# EAGLE board node2-frontend (EAGLE 4.11)
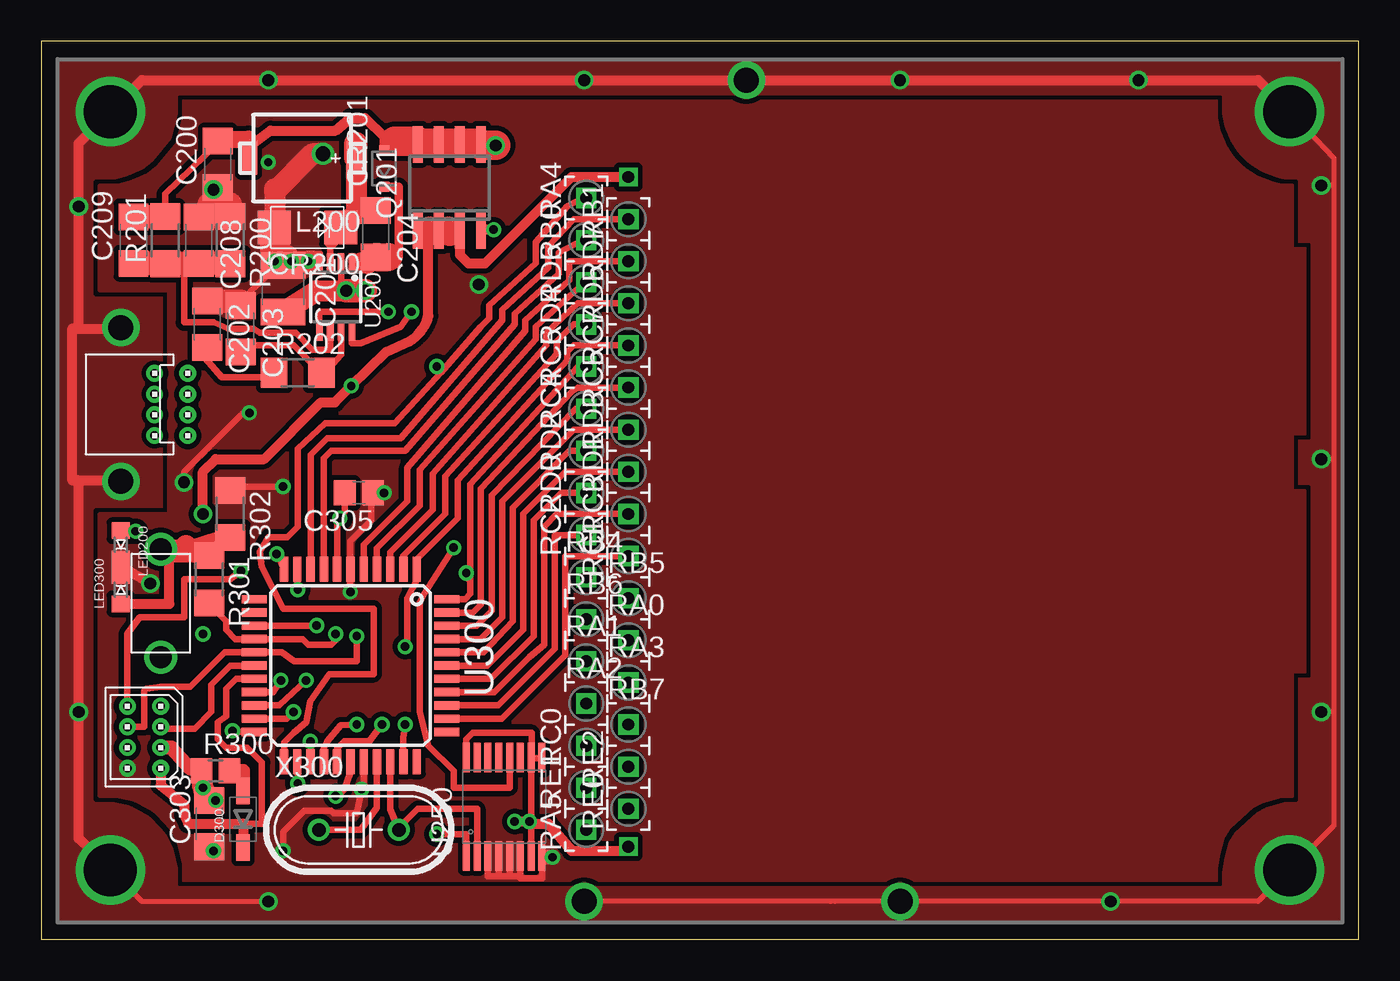
[diagram p0: board, top side]
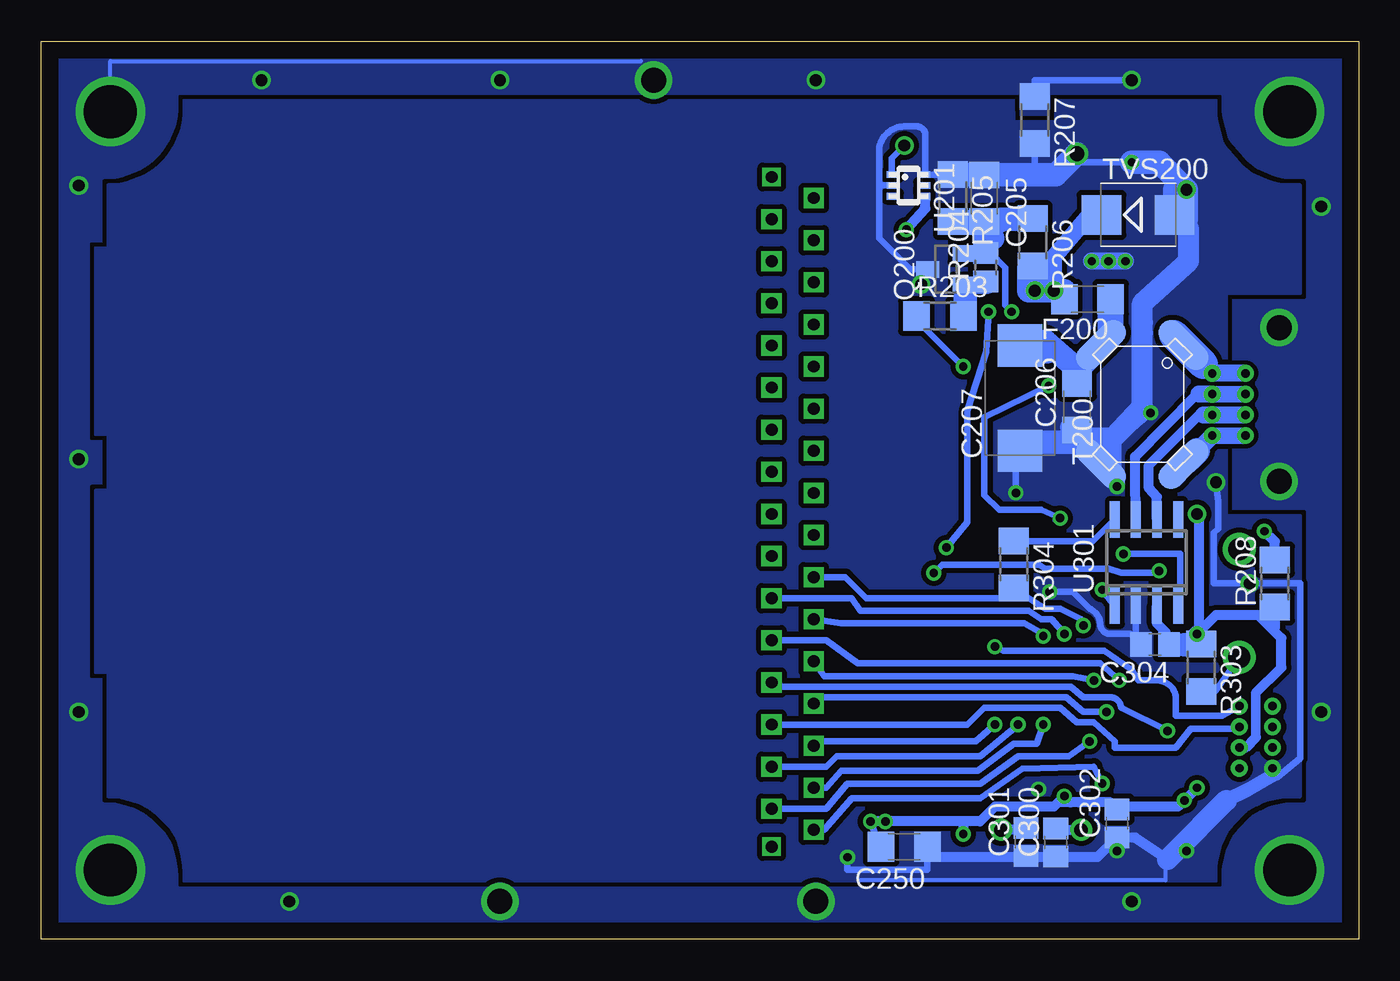
[diagram p1: board, bottom side, seen from below]

Size 79.43 x 54.14 mm. Coordinates in mm from the lower left corner, seen from the top.
Outline: 0,0 79.43,0 79.43,54.14 0,54.14 0,0
Copper layers (1*16): Top 0.035mm / dielectric 1.5mm / Bottom 0.035mm
Design rules "LV2": minimum track width 8mil, minimum drill 20mil, track to track 8mil, track to pad 8mil, pad to pad 8mil, via to via 8mil, smd to smd 0mil, copper to edge 40mil, drill to drill 8mil, minimum pad ring 10mil, minimum via ring 8mil, stop-mask expansion 4mil, vias tented up to drill 0mil, thermal gap 10mil
tKeepout: area 72.1,46.7 to 78.4,53.1; area 72.1,1 to 78.4,7.4; area 1,46.7 to 7.3,53.1; area 1,1 to 7.3,7.4

## Footprints (pad centres in the part's own frame; a part is rotated, then mirrored left to right if it is on the bottom)
C1206 = smd 1.6 x 1.8: 1 -1.4,0; 2 1.4,0
C1210 = smd 1.6 x 2.7: 1 -1.4,0; 2 1.4,0
D/7343-31R = smd 2.55 x 2.7: + 3.175,0; - -3.175,0
C0805 = smd 1.3 x 1.5: 1 -0.85,0; 2 0.85,0
JST-08R-JED = drill 0.508 pad 1.016 round: 1 1.875,1; 2 1.875,-1; 3 0.625,1; 4 0.625,-1; 5 -0.625,1; 6 -0.625,-1; 7 -1.875,1; 8 -1.875,-1
CAN_NODE = drill 0.508 pad 1.016 round: B+@1 2,1.875; B+@2 0,1.875; B-@7 2,-1.875; B-@8 0,-1.875; CANH@3 2,0.625; CANH@4 0,0.625; CANL@5 2,-0.625; CANL@6 0,-0.625 | drill 1.511 round: CHASSIS@1 -2.032,4.636; CHASSIS@2 -2.032,-4.636
NMINIP2-J1 = smd 2 x 2: A 2,0; C -2,0
SOD323-R = smd 0.6 x 0.6: A 1.1,0; C -1.1,0
SOD-123-DIODE = smd 1.6 x 0.8: 1(CATHODE) -1.7,0; 2(ANODE) 1.7,0
1206 = smd 1.6 x 1.8: 1 -1.4,0; 2 1.4,0
MP2A = smd 1.05 x 2: P1 -3.225,0; P2 3.225,0
0603-DIODE = smd 1 x 1.1: A -0.85,0; K 0.85,0
SOT23 = smd 1 x 1.4: 1 -0.95,-1.1; 2 0.95,-1.1; 3 0,1.1
SO8 = smd 0.6 x 2.2: 1 -1.905,-2.6; 2 -0.635,-2.6; 3 0.635,-2.6; 4 1.905,-2.6; 5 1.905,2.6; 6 0.635,2.6; 7 -0.635,2.6; 8 -1.905,2.6
R1206 = smd 1.6 x 1.803: 1 -1.422,0; 2 1.422,0
R0805 = smd 1.3 x 1.5: 1 -0.85,0; 2 0.85,0
PAD_SQUARE_APC-FREE_0.1/028 = drill 0.711 pad 1.168 square: PAD 0,0
SW_6X3.5MM = drill 1.321 round: 1 -3.25,0; 2 3.25,0
CMS1 = smd 3.63 x 1.5 rotated 45: 1 3.58,-2.5; 3 -3.58,2.5 | smd 3.63 x 1.5 rotated 135: 2 3.58,2.5; 4 -3.58,-2.5
SMB = smd 2.4 x 2.4: A 2.2,0; C -2.2,0
MSOP8 = smd 0.4 x 1.2: 1 -0.975,-2.05; 2 -0.325,-2.05; 3 0.325,-2.05; 4 0.975,-2.05; 5 0.975,2.05; 6 0.325,2.05; 7 -0.325,2.05; 8 -0.975,2.05
SC70-6 = smd 0.4 x 0.75: 1 -0.65,-0.95; 2 0,-0.95; 3 0.65,-0.95; 4 0.65,0.95; 5 0,0.95; 6 -0.65,0.95
TSSOP-16 = smd 0.42 x 1.78: 1 -2.275,-2.97; 2 -1.625,-2.97; 3 -0.975,-2.97; 4 -0.325,-2.97; 5 0.325,-2.97; 6 0.975,-2.97; 7 1.625,-2.97; 8 2.275,-2.97; 9 2.275,2.97; 10 1.625,2.97; 11 0.975,2.97; 12 0.325,2.97; 13 -0.325,2.97; 14 -0.975,2.97; 15 -1.625,2.97; 16 -2.275,2.97
TQFP44 = smd 1.5 x 0.5: 1 -5.8,4; 2 -5.8,3.2; 3 -5.8,2.4; 4 -5.8,1.6; 5 -5.8,0.8; 6 -5.8,0; 7 -5.8,-0.8; 8 -5.8,-1.6; 9 -5.8,-2.4; 10 -5.8,-3.2; 11 -5.8,-4; 23 5.8,-4; 24 5.8,-3.2; 25 5.8,-2.4; 26 5.8,-1.6; 27 5.8,-0.8; 28 5.8,0; 29 5.8,0.8; 30 5.8,1.6; 31 5.8,2.4; 32 5.8,3.2; 33 5.8,4 | smd 0.5 x 1.5: 12 -4,-5.8; 13 -3.2,-5.8; 14 -2.4,-5.8; 15 -1.6,-5.8; 16 -0.8,-5.8; 17 0,-5.8; 18 0.8,-5.8; 19 1.6,-5.8; 20 2.4,-5.8; 21 3.2,-5.8; 22 4,-5.8; 34 4,5.8; 35 3.2,5.8; 36 2.4,5.8; 37 1.6,5.8; 38 0.8,5.8; 39 0,5.8; 40 -0.8,5.8; 41 -1.6,5.8; 42 -2.4,5.8; 43 -3.2,5.8; 44 -4,5.8
HC49U70 = drill 0.813 round: 1 -2.413,0; 2 2.413,0

## Placement (x,y rotation side)
C200  22  [C1206]  10.63,46.73 90 top
C201  10  [C1210]  14.57,39.24 270 top
C202  470pF  [C1206]  9.99,37.08 270 top
C203  np  [C1206]  12.03,36.83 270 top
C204  0.1  [C1206]  20.16,42.54 270 top
C205  .1  [C1206]  22.57,44.7 270 bottom
C206  .33  [C1206]  16.98,32.13 90 bottom
C207  22  [D/7343-31R]  20.41,32.63 90 bottom
C208  10pF  [C1206]  9.49,42.16 270 top
C209  120pF  [C1206]  5.55,42.16 90 top
C250  .1  [C1206]  27.39,5.58 180 bottom
C300  27pF  [C0805]  18.25,5.84 90 bottom
C301  27pF  [C0805]  20.05,5.86 90 bottom
C302  .1  [C0805]  14.57,6.98 90 bottom
C303  .1  [C1206]  10.12,6.98 90 top
C304  .1  [C0805]  12.28,17.77 180 bottom
C305  .1  [C0805]  19.14,26.92 180 top
CF300  ICD  [JST-08R-JED]  6.18,12.19 270 top
CM200  CAN  [CAN_NODE]  6.82,32.25 0 top
CR200  MA2Q705  [NMINIP2-J1]  16.04,42.92 180 top
CR201  1N4448HWS  [SOD323-R]  20.66,46.48 90 top
D300  1N4148  [SOD-123-DIODE]  12.15,7.23 90 top
F200  1A  [1206]  16.35,38.6 180 bottom
L200  47uH  [MP2A]  15.71,47.11 180 top
LED200  LED-GRN-  [0603-DIODE]  4.79,23.79 270 top
LED300  LED-RED-0603  [0603-DIODE]  4.79,21.08 90 top
Q200  '3906  [SOT23]  24.88,40.4 90 bottom
Q201  TPC8009  [SO8]  24.6,45.33 0 top
R200  10k  [R1206]  11.39,42.16 270 top
R201  29.4k  [R1206]  7.46,42.16 90 top
R202  10k  [R1206]  15.46,34.16 0 top
R203  10k  [R1206]  25.24,37.59 0 bottom
R204  100k  [R0805]  22.49,40.52 90 bottom
R205  10.0k  [R1206]  24.47,44.7 270 bottom
R206  60.4k  [R1206]  19.65,42.03 270 bottom
R207  100k  [R1206]  19.52,49.4 270 bottom
R208  1.8k  [R1206]  5.04,21.46 90 bottom
R300  1k  [R0805]  10.5,10.15 0 top
R301  750  [R1206]  10.12,21.71 270 top
R302  47.5k  [R1206]  11.39,25.65 270 top
R303  1.8k  [R1206]  9.49,16.38 270 bottom
R304  ???  [R1206]  20.79,22.6 270 bottom
RA0  t19  [PAD_SQUARE_APC-FREE_0.1/028]  35.4,18.03 0 top
RA1  t20  [PAD_SQUARE_APC-FREE_0.1/028]  32.85,16.76 0 top
RA2  t21  [PAD_SQUARE_APC-FREE_0.1/028]  32.85,14.22 0 top
RA3  t22  [PAD_SQUARE_APC-FREE_0.1/028]  35.4,15.49 0 top
RA4  T23  [PAD_SQUARE_APC-FREE_0.1/028]  32.85,44.7 90 top
RA5  t24  [PAD_SQUARE_APC-FREE_0.1/028]  32.85,6.6 90 top
RB0  t8  [PAD_SQUARE_APC-FREE_0.1/028]  32.85,42.16 90 top
RB1  t9  [PAD_SQUARE_APC-FREE_0.1/028]  35.4,43.43 90 top
RB4  t14  [PAD_SQUARE_APC-FREE_0.1/028]  32.85,21.84 0 top
RB5  t15  [PAD_SQUARE_APC-FREE_0.1/028]  35.4,20.57 0 top
RB6  t16  [PAD_SQUARE_APC-FREE_0.1/028]  32.85,19.3 0 top
RB7  t17  [PAD_SQUARE_APC-FREE_0.1/028]  35.4,12.95 0 top
RC0  t32  [PAD_SQUARE_APC-FREE_0.1/028]  32.85,11.68 90 top
RC1  t35  [PAD_SQUARE_APC-FREE_0.1/028]  35.4,23.11 90 top
RC2  t36  [PAD_SQUARE_APC-FREE_0.1/028]  32.85,24.38 90 top
RC3  t37  [PAD_SQUARE_APC-FREE_0.1/028]  35.4,25.65 90 top
RC4  t42  [PAD_SQUARE_APC-FREE_0.1/028]  32.85,32 90 top
RC5  t43  [PAD_SQUARE_APC-FREE_0.1/028]  35.4,33.27 90 top
RC6  t44  [PAD_SQUARE_APC-FREE_0.1/028]  32.85,34.54 90 top
RC7  t1  [PAD_SQUARE_APC-FREE_0.1/028]  35.4,35.81 90 top
RD0  t38  [PAD_SQUARE_APC-FREE_0.1/028]  32.85,26.92 90 top
RD1  t39  [PAD_SQUARE_APC-FREE_0.1/028]  35.4,28.19 90 top
RD2  t40  [PAD_SQUARE_APC-FREE_0.1/028]  32.85,29.46 90 top
RD3  t41  [PAD_SQUARE_APC-FREE_0.1/028]  35.4,30.73 90 top
RD4  t2  [PAD_SQUARE_APC-FREE_0.1/028]  32.85,37.08 90 top
RD5  t3  [PAD_SQUARE_APC-FREE_0.1/028]  35.4,38.35 90 top
RD6  t4  [PAD_SQUARE_APC-FREE_0.1/028]  32.85,39.62 90 top
RD7  t5  [PAD_SQUARE_APC-FREE_0.1/028]  35.4,40.89 90 top
RE0  t25  [PAD_SQUARE_APC-FREE_0.1/028]  35.4,7.87 90 top
RE1  t26  [PAD_SQUARE_APC-FREE_0.1/028]  32.85,9.14 90 top
RE2  t27  [PAD_SQUARE_APC-FREE_0.1/028]  35.4,10.41 90 top
SW300  SW_MOMENTARY-6X3.5MM  [SW_6X3.5MM]  7.2,20.26 90 top
T200  CMS1  [CMS1]  13.04,32.25 90 bottom
TVS200  SMBJ18A  [SMB]  13.3,43.68 0 bottom
U200  LT1767EMS8  [MSOP8]  17.74,38.73 180 top
U201  MAX4841  [SC70-6]  27.14,45.46 270 bottom
U250  HC161  [TSSOP-16]  27.9,8 0 top
U300  PIC18F458  [TQFP44]  18.63,16.5 270 top
U301  CANBUS  [SO8]  12.79,22.73 0 bottom
X300  10MHz  [HC49U70]  19.14,6.6 0 top

## Library data of the parts
C200-C206 C208 C209 C250 = discrete-smd-ipc
C207 C300-C305 R200-R208 R300-R304 = rcl
CF300 CM200 D300 L200 LED200 LED300 Q201 RA0 RA1-RA5 RB0 RB1 RB4-RB7 RC0 RC1-RC7 RD0 RD1-RD7 RE0 RE1 RE2 SW300 T200 U201 U250 U300 U301 = psas_eagle_library
CR200 F200 = custom
CR201 TVS200 = diode
Q200 = semicon-smd-ipc
U200 = custom-linear-technology
X300 = crystal

## Nets
B+: CM200.B+@1 CM200.B+@2 T200.1
B-: CM200.B-@7 CM200.B-@8 T200.4
BIN: C206.2 C207.+ F200.1 T200.2
BOOST: C204.2 CR201.C U200.1
CAN_RS: R304.1 U301.8
CANH: CM200.CANH@3 CM200.CANH@4 U301.7
CANL: CM200.CANL@5 CM200.CANL@6 U301.6
CHASSIS: CM200.CHASSIS@1 CM200.CHASSIS@2 R207.1
FB: C208.2 C209.1 R200.2 R201.1 U200.6
GND: C200.1 C201.1 C202.1 C203.1 C205.1 C206.1 C207.- C208.1 C250.1 C300.1 C301.1 C302.1 C303.1 C304.2 C305.1 CF300.2 CR200.A LED200.K LED300.K Q200.3 R200.1 R205.1 R207.2 R302.1 T200.3 TVS200.A U200.4 U201.2 U201.6 U250.3 U250.4 U250.5 U250.6 U250.8 U300.6 U300.29 U301.2
LED200_A: LED200.A R208.2
PIC_CANRX: U300.11 U301.4
PIC_CANTX: U300.10 U301.1
PIC_CLKIN: C300.2 U300.30 X300.1
PIC_CLKOUT/10MHZ: C301.2 U250.2 U300.31 X300.2
PIC_LAMP: LED300.A R301.1 R302.2 SW300.2
PIC_MCLR/VPP: CF300.1 D300.1(CATHODE) U300.18
PIC_PWR: C250.2 C302.2 C303.2 C304.1 C305.2 CF300.3 R208.1 R300.1 R303.1 U250.1 U250.7 U250.9 U250.10 U250.16 U300.7 U300.28 U301.3
PIC_RA0/AN0: RA0.PAD U300.19
PIC_RA1/AN1: RA1.PAD U300.20
PIC_RA2/AN2: RA2.PAD U300.21
PIC_RA3/AN3: RA3.PAD U300.22
PIC_RA4/SPS_OFF\: R203.1 RA4.PAD U300.23
PIC_RA5/AN4: RA5.PAD U300.24
PIC_RB0/INT0: RB0.PAD U300.8
PIC_RB1/INT1: RB1.PAD U300.9
PIC_RB4/CAN_RS: R304.2 RB4.PAD U300.14
PIC_RB5: R301.2 RB5.PAD U300.15
PIC_RB6: CF300.6 RB6.PAD U300.16
PIC_RB7: CF300.5 RB7.PAD U300.17
PIC_RC0/T1CKI: RC0.PAD U300.32
PIC_RC1/T1OSI: RC1.PAD U300.35
PIC_RC2/CCP1: RC2.PAD U300.36
PIC_RC3/SCL: RC3.PAD U300.37
PIC_RC4/SDI: RC4.PAD U300.42
PIC_RC5/SDO: RC5.PAD U300.43
PIC_RC6/TX: CF300.8 RC6.PAD U300.44
PIC_RC7/RX: CF300.7 RC7.PAD U300.1
PIC_RD0: RD0.PAD U300.38
PIC_RD1: RD1.PAD U300.39
PIC_RD2: RD2.PAD U300.40
PIC_RD3: RD3.PAD U300.41
PIC_RD4: RD4.PAD U300.2
PIC_RD5: RD5.PAD U300.3
PIC_RD6: RD6.PAD U300.4
PIC_RD7: RD7.PAD U300.5
PIC_RE0/AN5: RE0.PAD U300.25
PIC_RE1/AN6: RE1.PAD U300.26
PIC_RE2/AN7: RE2.PAD U300.27
Q201_B: Q200.1 R203.2 R204.1
Q201_GATE: Q201.4 U201.4
SHDN\: C205.2 Q200.2 R204.2 R205.2 R206.1 U200.5
SPS: Q201.1 Q201.2 Q201.3
SPS_BUCK_OUT: C200.2 C209.2 CR201.A L200.P2 Q201.5 Q201.6 Q201.7 Q201.8 R201.2 U201.1
SPS_SYNC: U200.8 U250.12
SW_PWR: R303.2 SW300.1
SYNC_QD: U250.11
VC: C203.2 R202.2 U200.7
VC_FLT: C202.2 R202.1
VIN: C201.2 F200.2 R206.2 TVS200.C U200.2
VPP_PULLUP: D300.2(ANODE) R300.2
VSW: C204.1 CR200.C L200.P1 U200.3

## Tracks (layer width: path | path; a pad name or v marks a point on that pad's centre or on a via)
B+
  Bottom 1.016: CM200.B+@2 CM200.B+@1 | CM200.B+@1 8.85,34.13 8.85,34.16 | CM200.B+@1 8.85,34.16 | 8.85,34.16 9.36,34.67
  Bottom 1.778: 9.36,34.67 10.63,35.94 | 10.63,35.94 T200.1 | 10.63,35.94 11.14,36.44
B-
  Bottom 0.406: T200.4 10.58,28.67 11.24,27.96
  Bottom 1.016: CM200.B-@8 8.85,30.35 CM200.B-@7 9.74,29.46
  Bottom 1.524: 9.74,29.46 arc0 11.24,27.96
BIN
  Bottom 0.406: T200.2 15.4,35.73 15.46,35.68 15.4,35.68
  Bottom 1.422: C206.2 16.98,34.29 | 15.43,35.96 15.46,35.94 | 15.43,35.96 T200.2 15.35,35.96 15.33,35.94 16.98,34.29 | 15.43,35.96 14.95,36.45 | 16.98,34.29 16.98,34.41 18.89,36.06 18.76,35.43 20.41,35.43 C207.+
  Bottom 1.575: 14.95,36.45 F200.1
BOOST
  Top 0.254: 19.65,40.78 20.28,40.78 C204.2
  Top 0.406: U200.1 19.65,40.78 19.65,40.76
  Top 0.508: CR201.C 21.55,45.38 21.55,41.14 20.92,41.14
  Top 1.27: 19.65,40.76 19.14,40.76
  Top 1.676: C204.2 20.28,41.14 20.92,41.14
CAN_RS
  Bottom 0.406: R304.1 20.79,24 16.02,24 U301.8
CANH
  Bottom 0.61: U301.7 13.42,26.28 13.47,27.07 13.47,29.1 9.75,32.88 9.61,32.89
  Bottom 1.016: 8.85,32.89 CM200.CANH@4 | 8.85,32.89 CM200.CANH@3 | 9.61,32.89 8.85,32.89
CANL
  Bottom 0.61: U301.6 12.15,26.66 12.64,27.2 12.64,28.59 9.6,31.63 9.36,31.62
  Bottom 1.016: 8.85,31.62 CM200.CANL@6 | 8.85,31.62 CM200.CANL@5 | 9.36,31.62 8.85,31.62
CHASSIS  (via drill 0.71, 1.51, 3.17)
  Top 0.254: 4.79,36.95 CM200.CHASSIS@1 4.79,36.83 | 4.79,27.68 CM200.CHASSIS@2
  Top 0.305: 77.94,45.46 77.94,47.11 v75.27,49.91 | 77.94,45.46 77.94,28.95 | 77.94,28.95 77.94,13.71 | 77.94,13.71 77.94,6.85 v75.27,4.19 73.37,2.28 v64.48,2.28 v51.78,2.28 | v51.78,2.28 51.65,2.28 | v51.78,2.28 47.84,2.28 | 47.84,2.28 47.59,2.28 | 47.84,2.28 v32.73,2.28 | v4.15,4.19 6.06,2.28 v13.68,2.28 | 77.94,13.71 v77.18,13.71 | 77.94,28.95 v77.18,28.95 | 77.94,45.46 v77.18,45.46
  Top 0.61: v4.15,4.19 2.25,6.09 v2.25,13.71 2.25,27.68 | 2.25,27.68 4.79,27.68 | 2.25,27.68 1.87,27.68 1.87,36.83 2.25,36.83 | 2.25,36.83 4.79,36.83 | 2.25,36.83 v2.25,44.19 2.25,48 v4.15,49.91 6.06,51.81 v13.68,51.81 v32.73,51.81 v42.51,51.81 v51.78,51.81 v66.15,51.81 73.37,51.81 v75.27,49.91
  Bottom 0.254: 43.27,52.95 75.27,52.95 v75.27,49.91
  Bottom 0.406: 19.52,50.8 R207.1 19.52,51.81 v13.68,51.81
  pour Bottom (isolate 0.254, rank 2, no thermals): 0.98,1.01 78.45,1.01 78.45,53.08 0.98,53.08
  pour Top (isolate 0.254, rank 2, no thermals): 0.98,1.01 0.98,53.08 78.45,53.08 78.45,1.01
FB
  Top 0.406: C209.1 | 11.9,40.76 11.8,40.76 R200.2 | U200.6 17.42,35.55 16.35,35.55 15.33,36.57 13.17,36.57 12.79,36.83 11.27,36.83 10.38,37.21 8.6,37.21 8.6,40.51 8.98,40.64 8.98,40.76
  Top 1.422: R200.2 11.37,40.76 C208.2 8.98,40.76 7.46,40.76 R201.1 7.43,40.76 C209.1
GND  (via drill 0.51, 0.71, 0.89)
  Top 0.254: 14.69,41.02 14.82,40.89 | U200.4 16.85,40.87 16.85,41.4 16.6,41.4 16.35,41.14 16.35,40.89
  Top 0.406: 14.09,45.24 CR200.A | v20.66,26.92 C305.1 19.9,26.92 19.9,25.27 18.63,24 U300.6 v18.63,20.95 | v19.3,9.05 19.01,7.62 17.62,7.62 17.49,7.74 15.84,7.74 14.57,6.47 v14.57,5.33 | C203.1 12.03,38.48 14.06,40.51 v14.06,40.89 | C200.1 10.63,45.46 v10.38,45.21 | v8.6,27.55 8.6,28.19 12.15,31.75 v12.54,31.75 12.66,31.75 | R302.1 11.62,27.3 v14.57,27.3 | v19.3,9.05 19.27,8.76 | U300.29 19.43,8.92 v19.3,9.05 | C303.1 v10.37,5.33 v10.38,5.33 | 28.23,3.8 U250.5 | 27.58,3.8 U250.4 | U250.3 26.93,3.8 27.58,3.8 | 28.23,3.8 27.58,3.8 | 28.23,3.8 28.88,3.8 U250.6 28.88,3.68 30.19,3.68 U250.8 30.75,5.03 v30.82,4.95 | 30.44,4.95 30.36,5.03
  Top 0.61: 14.09,41.02 14.06,41.02 | 14.06,41.02 v14.06,40.89 | 14.06,41.02 13.93,40.89 | LED300.K 4.83,22.43 v6.57,21.46
  Top 0.914: v30.82,4.95 30.44,4.95
  Top 1.016: LED300.K LED200.K
  Top 1.27: C201.1 14.82,40.89 v15.07,40.89 v16.09,40.89 16.35,40.89 | 14.09,45.24 14.06,45.24 14.06,45.08 | 14.06,45.08 14.06,43.68 | 14.06,45.08 16.35,47.37 v16.98,47.37
  Top 1.422: 10.63,43.56 C208.1 | 10.63,43.56 11.39,43.56 | 10.63,43.56 | 10.63,44.32 10.63,43.56 | C200.1 10.63,44.32 | C202.1 12.03,38.48 | 10.63,44.32 10.12,44.32 | R200.1 11.39,44.32 10.63,44.32
  Top 1.778: CR200.A 14.09,41.02 14.69,41.02
  Bottom 0.254: 30.09,3.55 11.65,3.55 11.65,4.82 11.52,4.82
  Bottom 0.406: 17.11,30.22 17.11,30.09 | 24.47,46.1 26.19,46.1 U201.6 26.12,46.11 26.12,48.51 arc-90 26.63,49.02 27.39,49.02 arc-90 28.92,47.49 28.92,45.46 | 28.92,45.46 28.92,42.29 27.03,40.4 Q200.3 26.38,40 v26.38,39.49 26.38,39.37 | 28.03,45.46 U201.2 28.92,45.46 | C207.- 20.47,29.39 20.66,29.2 v20.66,26.92 | v18.63,20.95 17.23,20.95 16.22,19.93 arc64 15.58,19.04 arc-90 14.95,18.41 13.77,18.41 C304.2 13.04,17.77 13.42,18.16 U301.2 | v19.3,9.05 19.14,9.01 | 14.57,6.34 C302.1 v14.57,5.33 | v13.68,46.86 16.73,46.86 17.11,47.24 | v8.6,27.55 8.47,26.41 8.47,24.76 8.72,24.51 8.72,21.46 v6.57,21.46 3.52,21.46 3.52,10.92 4.92,9.77 5.18,10.03 CF300.2 | 14.82,30.35 14.76,30.28 14.44,29.97 arc4 v12.54,31.75 12.79,31.75 | 11.2,5.14 11.14,5.08 10.63,5.08 v10.38,5.33 | C250.1 25.99,4.19 30.82,4.19 v30.82,4.95 | 19.52,48 R207.2 19.52,46.1 18.25,46.1
  Bottom 0.61: 17.11,29.97 17.11,30.22 17.11,30.6 C206.1 16.48,30.22 15.07,30.22 | 11.52,4.82 13.46,6.13 C302.1 15.75,4.95 18.25,4.95 C300.1 18.29,4.95 19.99,4.95 C301.1 20.12,4.95 25.36,4.95 C250.1
  Bottom 0.813: 7.96,8.38 6.69,9.01 5.17,9.9 5.17,10.3 CF300.2
  Bottom 0.965: v14.57,27.3 14.57,27.93 14.95,28.32
  Bottom 1.016: v14.06,40.89 v16.09,40.89 | 14.82,30.22 14.82,28.32 14.95,28.32 15.46,28.32
  Bottom 1.27: 16.98,30.47 16.85,30.35 | C206.1 16.98,30.47 | 16.98,30.47 17.36,30.86 | 7.96,8.38 11.2,5.14 11.52,4.82 | 13.04,36.57 13.04,32.13 14.76,30.28 14.82,30.22 15.07,30.22 16.5,30.22 | 13.04,36.57 13.04,38.35 10.25,40.89 10.25,42.84 TVS200.A | 13.04,36.57 13.04,37.21
  Bottom 1.422: T200.3 16.98,30.12 C206.1 | C205.1 22.7,46.1 | R205.1 24.47,46.1 22.7,46.1 | v16.98,47.37 17.11,47.24 18.25,46.1 22.7,46.1 | v13.68,46.86 12.03,46.86 v10.38,45.21 | v10.38,45.21 10.38,43.43 | TVS200.A 11.1,45.21 v10.38,45.21 | 20.47,29.39 20.41,29.33 19.77,29.97 17.11,29.97
  pour Bottom (isolate 0.305, no thermals): 3.52,25.52 7.96,25.52 7.96,29.59 4.79,29.59 4.79,34.92 7.96,34.92 7.96,38.98 3.52,38.98 3.52,45.46 4.66,45.46 5.17,45.59 5.55,45.72 6.44,46.1 7.07,46.6 7.84,47.49 8.22,48 8.6,49.53 8.6,50.54 18.25,50.54 18.25,49.27 20.79,49.27 20.79,50.54 70.83,50.54 70.83,49.53 70.95,48.76 71.34,47.87 71.84,47.11 72.48,46.48 73.24,45.97 74.26,45.59 74.77,45.46 75.4,45.46 75.4,41.65 76.16,41.65 76.16,30.47 75.4,30.47 75.4,27.05 76.16,27.05 76.16,16.12 75.4,16.12 75.4,8.63 74.77,8.63 73.88,8.38 73.49,8.25 72.99,8 72.48,7.62 71.59,6.73 71.21,6.09 70.95,5.2 70.83,4.31 70.83,3.55 50.63,3.55 48.09,3.55 8.6,3.55 8.6,4.57 8.47,5.2 8.34,5.71 7.96,6.47 7.58,6.98 6.82,7.74 6.18,8.12 5.68,8.38 5.17,8.5 4.53,8.63 3.52,8.63
  pour Top (isolate 0.305, no thermals): 3.52,8.63 3.52,25.65 7.71,25.65 7.71,39.11 3.52,39.11 3.52,45.46 4.66,45.46 5.55,45.72 6.44,46.1 7.07,46.6 8.22,48 8.6,49.53 8.6,50.54 54.7,50.54 61.05,50.54 70.83,50.54 70.83,49.53 70.95,48.76 71.34,47.87 71.84,47.11 72.48,46.48 73.24,45.97 74.26,45.59 74.77,45.46 75.4,45.46 75.4,41.65 76.16,41.65 76.16,30.47 75.4,30.47 75.4,27.05 76.16,27.05 76.16,16.12 75.4,16.12 75.4,8.63 74.77,8.63 73.49,8.25 72.99,8 71.59,6.73 71.21,6.09 70.95,5.2 70.83,4.31 70.83,3.55 44.29,3.55 38.57,3.55 8.6,3.55 8.6,4.57 8.34,5.71 7.96,6.47 7.58,6.98 6.82,7.74 5.68,8.38 4.53,8.63
LED200_A  (via drill 0.51)
  Top 0.61: LED200.A 4.79,24.76 v5.68,24.61
  Bottom 0.61: R208.2 5.04,24 v5.68,24.61
PIC_CANRX  (via drill 0.51)
  Top 0.406: U300.11 14.61,22.3 v14.19,23.24
  Bottom 0.406: v14.19,23.24 10.76,23.24 10.76,21.33 U301.4 10.88,20.06
PIC_CANTX  (via drill 0.51)
  Top 0.406: U300.10 15.43,21.1 v15.46,21.08
  Bottom 0.406: U301.1 v15.46,21.08 14.95,20.95 14.95,20.7
PIC_CLKIN
  Top 0.406: U300.30 20.23,7.95 19.27,6.6 X300.1
  Bottom 0.61: C300.2 18.16,6.6 X300.1
PIC_CLKOUT/10MHZ
  Top 0.406: U300.31 21.03,7.86 X300.2 21.55,6.73 22.7,7.87 26.28,7.87 U250.2
  Bottom 0.61: C301.2 20.03,6.69 20.03,6.6 X300.2
PIC_LAMP
  Top 0.406: 7.2,23.62 SW300.2 7.2,23.49
  Top 0.61: LED300.A 7.71,20.23 7.71,23.49
  Top 0.813: SW300.2 7.71,23.49 7.68,23.13 R301.1
  Top 1.27: R301.1 10.12,22.98 9.21,23.52 R302.2 | 7.2,23.49 8.72,23.49 8.72,23.74
PIC_MCLR/VPP
  Top 0.406: U300.18 11.73,15.71 11.14,15.11 11.14,13.46 10.63,13.08 10.63,12.06 11.14,11.55 12.41,11.55 13.3,10.66 13.3,6.98 12.15,6.98
  Top 0.61: 7.18,9.28 8.6,8.15 8.6,7.49 8.85,6.98 12.15,6.98 D300.1(CATHODE) | CF300.1 7.18,9.28 | 7.18,9.28 7.2,9.27
PIC_PWR  (via drill 0.51, 0.71)
  Top 0.406: U300.28 18.63,10.03 18.25,9.01 18,8.76 v17.74,8.63 | C305.2 18.29,25.78 v18,25.39 18,25.27 | 18,25.27 18.12,25.27 | U300.7 17.83,25.27 18,25.27 | U250.10 29.53,7.11 v29.43,7.11 29.43,6.98 29.53,6.98 U250.7 | U250.1 25.63,6.34 v23.84,6.34 | 30.18,10.92 30.19,10.92 | 30.18,10.92 U250.9 | U250.10 29.53,10.92 29.55,10.92 | 29.55,10.92 30.18,10.92 | U250.16 25.63,12.07 26,12.44 29.55,12.44 29.55,10.92 | 29.55,10.92 29.55,10.97 U250.10 | 9.72,10.28 9.74,10.26 R300.1 | 35.27,5.46 v35.4,5.58 | C303.2 v10.5,8.38
  Top 0.61: v9.74,9.14 9.99,8 | v9.74,25.65 9.74,28.19 10.5,28.95 13.42,28.95 16.85,32.38 17.69,32.38 v18.68,33.37 | v18.68,33.37 18.71,33.4 | v18.68,33.37 20.79,35.43 22.19,36.06 arc46 23.33,37.59 23.33,42.03 | 29.53,6.98 30.57,6.98 31.97,5.33 35.01,5.33 35.27,5.46 | v28.54,7.11 v29.43,7.11
  Top 0.813: 7.84,11.55 8.98,10.28 9.72,10.28 | 7.84,11.55 7.83,11.56 | 7.84,11.55 7.83,11.55
  Top 0.838: CF300.3 7.84,11.55
  Top 1.27: C303.2 v9.74,9.14 R300.1
  Bottom 0.406: v18.68,33.37 22.57,31.49 22.57,26.79 21.68,25.9 19.14,25.9 v18,25.39 18.25,25.27 | C250.2 28.92,5.58 v29.43,7.11 | R303.1 9.49,17.9 v9.74,18.41 9.61,18.41 | 14.57,8 14.57,7.87 | 5.04,20.06 R208.1 5.04,19.55
  Bottom 0.508: CF300.3 6.81,11.56
  Bottom 0.559: 6.18,12.19 6.18,14.85
  Bottom 0.61: v9.74,18.41 8.6,19.55 6.06,19.55 | 6.06,19.55 4.66,18.16 4.66,16.38 6.18,14.85 | 14.57,8 10.88,8 v9.74,9.14 | 6.06,19.55 5.04,19.55 5.04,18.79 | 6.81,11.56 6.18,12.19 | 9.61,18.41 9.61,25.27 v9.74,25.65 | C302.2 14.57,7.87 14.95,8.25 16.85,8.25 | 16.85,8.25 17.36,8.25 v17.74,8.63 18.12,8.25 | 23.84,7.11 22.82,7.11 21.93,8 18.38,8 18.12,8.25 | 23.84,7.11 v28.54,7.11 v29.43,7.11 | 23.84,7.11 v23.84,6.34 | U301.3 12.15,19.04 11.65,18.54 11.65,18.03 11.39,17.77 | 16.85,8.25 18.12,8.25
  Bottom 1.016: v9.74,18.41 10.25,17.9 10.25,17.77
  Bottom 1.27: 10.5,17.77 11.39,17.77 C304.1
  Bottom 1.422: 10.25,17.77 10.5,17.77
PIC_RA0/AN0  (via drill 0.51)
  Top 0.406: U300.19 13.98,14.9 v14.44,15.62
  Bottom 0.406: v14.44,15.62 15.58,16.63 30.19,16.63 32.09,18.03 RA0.PAD
PIC_RA1/AN1  (via drill 0.51)
  Top 0.406: U300.20 14.33,14.1 v15.96,15.62
  Bottom 0.406: v15.96,15.62 17.23,15.87 32.22,15.87 RA1.PAD
PIC_RA2/AN2  (via drill 0.51)
  Top 0.406: U300.21 14.8,13.3 v15.2,13.71
  Bottom 0.406: v15.2,13.71 16.6,13.71 17.62,14.6 32.22,14.6 RA2.PAD
PIC_RA3/AN3  (via drill 0.51)
  Top 0.406: U300.22 11.58,12.5 arc-90 v11.52,12.57
  Bottom 0.406: v11.52,12.57 14.31,13.96 arc-90 15.07,14.6 16.6,14.6 17.36,15.23 34.76,15.23 RA3.PAD
PIC_RA4/SPS_OFF\  (via drill 0.51)
  Top 0.406: 24.09,34.16 21.3,31.11 17.11,31.11 15.46,29.59 15.46,24.89 14.82,24.25 13.68,24.25 13.17,23.36 13.3,22.47 14.57,19.93 20.03,19.93 20.03,16 17.36,16 16.22,14.35 15.96,13.08 15.2,12.44 14.63,11.87 U300.23 | RA4.PAD 32.6,44.7 31.71,44.19 29.81,42.03 29.81,40.76 27.01,38.22 27.01,37.46 26.51,36.95 24.09,34.16 | 24.09,34.16 v23.84,34.54
  Bottom 0.406: 26.63,37.59 R203.1 26.63,37.56 26.63,37.33 v23.84,34.54
PIC_RA5/AN4  (via drill 0.51)
  Top 0.406: U300.24 15.46,10.68 v15.46,9.39
  Bottom 0.406: v15.46,9.39 15.96,10.41 20.28,10.28 22.82,8.5 30.57,8.5 32.22,6.6 RA5.PAD
PIC_RB0/INT0
  Top 0.406: U300.8 17.03,29 17.49,29.46 21.93,29.46 28.54,37.08 28.54,37.71 31.2,40.13 31.2,41.4 32.85,42.29 RB0.PAD
PIC_RB1/INT1
  Top 0.406: U300.9 16.23,29.22 17.23,30.22 21.68,30.22 27.78,37.33 27.78,37.97 30.57,40.51 30.57,41.78 32.09,43.43 RB1.PAD
PIC_RB4/CAN_RS  (via drill 0.51)
  Top 0.406: U300.14 16.33,18.9 v16.6,18.92
  Bottom 0.406: v16.6,18.92 16.73,19.3 18,19.93 18.89,19.93 19.9,20.57 20.03,20.57 | 20.03,20.57 29.68,20.57 30.95,21.84 RB4.PAD | 20.79,21.2 R304.2 20.51,21.18 20.03,20.7 20.03,20.57
PIC_RB5  (via drill 0.51)
  Top 0.406: R301.2 10.12,20.19 | 10.12,20.19 10.25,20.19 | v17.74,18.41 17.74,18.03 17.49,17.77 16.09,17.77 15.76,18.11 U300.15 11.7,18.11 11.14,18.66 11.14,19.17 10.12,20.19
  Bottom 0.406: v17.74,18.41 18.5,19.3 19.14,19.3 19.9,19.81 30.06,19.81 30.57,20.57 RB5.PAD
PIC_RB6  (via drill 0.51)
  Top 0.406: U300.16 12.79,17.27 | CF300.6 6.18,12.81 6.18,14.98 6.31,15.11 7.2,15.23 8.98,15.23 11.05,17.3 U300.16 | U300.16 14.48,17.3 15.24,16.76 19.01,16.76 v19.01,18.28
  Bottom 0.406: v19.01,18.28 19.27,18.54 20.16,19.04 31.2,19.04 RB6.PAD
PIC_RB7
  Top 0.406: U300.17 11.39,16.5 10.25,15.36 10.25,13.71 9.23,12.69 7.3,12.69 CF300.5
  Bottom 0.406: RB7.PAD 23.58,12.95 22.57,13.96 18,13.96 16.98,13.08 15.96,13.08 14.69,11.93 14.69,11.55 11.01,11.55 10.12,12.69 7.33,12.69 7.2,12.82 CF300.5
PIC_RC0/T1CKI  (via drill 0.51)
  Top 0.406: U300.32 21.83,12.16 v21.93,12.95
  Bottom 0.406: v21.93,12.95 23.08,11.93 32.6,11.93 RC0.PAD
PIC_RC1/T1OSI
  Top 0.406: U300.35 27.75,13.3 31.59,17.14 31.59,23.11 RC1.PAD
PIC_RC2/CCP1
  Top 0.406: U300.36 27.53,14.1 30.95,17.52 30.95,24.38 RC2.PAD
PIC_RC3/SCL
  Top 0.406: 31.84,25.65 32.22,25.65 | 31.84,25.65 RC3.PAD | U300.37 27.32,14.9 29.43,17.01 30.32,17.77 30.32,24.89 31.08,25.65 31.84,25.65
PIC_RC4/SDI
  Top 0.406: U300.42 26.24,18.9 27.14,19.81 27.14,26.79 32.22,32 RC4.PAD
PIC_RC5/SDO
  Top 0.406: U300.43 26.02,19.7 26.51,20.19 26.51,27.17 31.97,33.02 32.35,33.27 RC5.PAD
PIC_RC6/TX  (via drill 0.51)
  Top 0.406: 5.17,15.36 5.18,15.35 5.17,15.35 5.17,15.36 | 5.17,15.36 5.17,18.41 5.93,19.43 8.6,19.43 8.6,21.71 11.39,21.71 v12.03,22.22 | CF300.8 5.17,14.06 5.17,15.36 | RC6.PAD 32.35,34.54 25.87,27.43 25.87,20.82 | v25.62,22.09 25.36,22.09 25.87,21.59 25.87,20.82 | U300.44 25.55,20.5 25.87,20.82
  Bottom 0.406: v12.03,22.22 12.28,22.09 14.31,22.09 15.07,22.35 18.89,22.35 19.27,22.6 25.11,22.6 v25.62,22.09
PIC_RC7/RX  (via drill 0.51)
  Top 0.406: v21.93,17.65 22.06,18.03 22.06,20.57 22.63,21.65 U300.1 22.63,22.92 25.11,25.39 25.11,27.68 31.71,34.92 31.71,35.43 32.09,35.81 RC7.PAD
  Bottom 0.406: CF300.7 7.2,14.06 8.22,13.47 11.01,13.47 11.01,14.47 arc-90 12.15,15.62 13.3,15.62 13.68,16.25 15.33,17.39 21.43,17.39 v21.93,17.65
PIC_RD0
  Top 0.406: U300.38 27.1,15.71 29.68,18.28 29.68,25.27 31.33,26.92 RD0.PAD
PIC_RD1
  Top 0.406: U300.39 26.89,16.5 29.05,18.66 29.05,25.65 31.59,28.19 RD1.PAD
PIC_RD2
  Top 0.406: RD2.PAD 31.84,29.46 28.41,26.03 28.41,19.17 26.67,17.3 U300.40
PIC_RD3
  Top 0.406: U300.41 26.45,18.11 27.78,19.43 27.78,26.41 32.09,30.73 RD3.PAD
PIC_RD4
  Top 0.406: U300.2 21.83,23.13 24.35,25.65 24.35,27.93 31.08,35.3 31.08,36.06 32.09,37.08 RD4.PAD 33.11,37.08
PIC_RD5
  Top 0.406: U300.3 21.03,23.35 23.58,25.9 23.58,28.06 30.44,35.81 30.44,36.57 32.35,38.35 RD5.PAD
PIC_RD6
  Top 0.406: U300.4 20.23,23.57 22.82,26.16 22.82,28.32 29.81,36.19 29.81,36.95 32.47,39.37 RD6.PAD
PIC_RD7
  Top 0.406: U300.5 19.43,23.78 22.06,26.41 22.06,28.44 29.17,36.7 29.17,37.33 31.84,39.75 31.84,40.89 RD7.PAD
PIC_RE0/AN5  (via drill 0.51)
  Top 0.406: U300.25 16.23,11.68 v16.22,11.93
  Bottom 0.406: v16.22,11.93 17.49,11.04 20.54,11.04 22.82,9.39 30.82,9.39 32.09,7.87 RE0.PAD
PIC_RE1/AN6  (via drill 0.51)
  Top 0.406: v19.01,12.95 18.05,12.9 17.23,11.93 17.03,11.48 U300.26
  Bottom 0.406: v19.01,12.95 19.39,11.81 20.79,11.81 22.95,10.15 31.2,10.15 32.09,9.14 RE1.PAD
PIC_RE2/AN7  (via drill 0.51)
  Top 0.406: U300.27 17.83,11.51 18.25,11.93 19.77,11.93 v20.54,12.95
  Bottom 0.406: v20.54,12.95 22.82,11.04 31.46,11.04 32.09,10.41 RE2.PAD
Q201_B
  Bottom 1.016: R204.1 22.44,39.55 22.31,39.45 Q200.1 23.71,39.45 23.71,38.73
  Bottom 1.422: R203.2 23.84,37.59 23.71,37.71 23.71,38.73
Q201_GATE  (via drill 0.51)
  Top 0.406: 26.57,42.79 Q201.4
  Top 0.61: v27.27,42.79 26.57,42.79
  Bottom 0.406: 26.12,44.62 U201.4
  Bottom 0.61: v27.27,42.79 26.12,44.06 26.12,44.62
SHDN\  (via drill 0.51)
  Top 0.406: U200.5 16.77,37.84 v20.92,37.84
  Bottom 0.406: v20.92,37.84 21.3,38.22 21.3,40.51 22.19,41.4 22.57,41.4 22.57,41.35
  Bottom 0.61: 22.57,41.4 22.57,42.16
  Bottom 1.016: R204.2 22.46,41.37 arc-90 22.7,41.27 arc90 22.37,41.35 22.57,41.35 Q200.2
  Bottom 1.422: C205.2 | R205.2 22.57,43.28 C205.2 | C205.2 21.68,43.3 21.55,43.43 20.03,43.43 R206.1 | C205.2 22.57,42.16 22.06,42.29
SPS  (via drill 0.71)
  Top 0.406: Q201.1 23.26,42.73 23.33,42.67 | Q201.3 24.67,42.73 24.6,42.67
  Top 0.61: Q201.3 25.24,41.27 25.74,40.76 26.76,40.76 31.97,45.97 v35.4,45.97
  Top 1.676: 23.33,42.67 23.4,42.73 Q201.2 24.53,42.73 24.6,42.67
SPS_BUCK_OUT  (via drill 0.71)
  Top 0.406: 26.44,48 Q201.5 | 24.03,48 Q201.7 23.9,48 | 25.17,48 Q201.6 | C200.2 10.63,48 7.46,44.95 R201.2 7.46,43.43 | 12.36,47.68 12.36,47.62 12.48,47.62 L200.P2
  Top 0.61: 20.66,48.38 CR201.A | 20.66,48.38 19.52,49.53 18.63,49.53 17.74,48.76 13.8,48.76 12.36,47.68 12.28,47.62 | 21.3,48.13 21.3,48.38 20.66,48.38
  Top 1.016: C200.2 10.63,48.26 12.48,48.26 L200.P2
  Top 1.422: R201.2 7.46,43.56 7.45,43.56 C209.2
  Top 1.778: Q201.5 26.51,47.87 v27.39,47.87 | Q201.6 25.24,48 26.44,48 | Q201.7 23.96,48 25.17,48 | 22.7,48 Q201.8 | 22.7,48 23.9,48 | 22.7,48 22.7,48.13 21.3,48.13
  Bottom 0.406: v27.39,47.87 28.16,47.11 28.16,46.11 U201.1
SPS_SYNC  (via drill 0.51)
  Top 0.406: U250.12 28.23,9.14 24.85,9.14 24.85,10.15 23.33,11.68 22.82,13.71 22.82,20.31 23.08,20.82 v24.85,23.62 | U200.8 18.72,35.94 19.27,35.94 21.68,36.95 v22.31,37.84
  Bottom 0.406: v24.85,23.62 23.58,25.14 23.58,31.87 22.44,35.43 v22.31,37.84
SW_PWR
  Bottom 0.406: SW300.1 8.6,14.98 10.12,14.98 R303.2
VC
  Top 0.406: C203.2 12.28,35.81 15.2,35.81 16.85,34.16 R202.2 17.11,34.16 18.07,35.25 U200.7
VC_FLT
  Top 0.406: C202.2 9.87,35.05 10.88,33.9 13.42,33.9 13.68,34.16 R202.1
VIN  (via drill 0.71)
  Top 0.406: 18.07,39.11 U200.2
  Top 1.27: C201.2 16.6,39.11 18.07,39.11 v18.38,39.11
  Top 1.422: v18.38,39.11 v19.52,39.11
  Bottom 1.016: TVS200.C 16.22,43.68 18.38,41.14 v18.38,39.11
  Bottom 1.422: F200.2 17.74,39.11 v18.38,39.11 v19.52,39.11 19.9,39.11 19.9,40.48 R206.2
VPP_PULLUP
  Top 0.813: R300.2 12.15,10.15 D300.2(ANODE)
VSW
  Top 0.254: L200.P1 19.01,47.11 18.89,47.11
  Top 0.406: CR200.C 18.12,42.92 17.42,42.22 U200.3
  Top 0.813: CR200.C 17.49,42.32 17.49,42.03
  Top 1.27: 18.12,42.92 19.14,43.94 20.28,43.94 | L200.P1 19.01,48.05 19.01,47.11 19.01,43.94 20.28,43.94 | 20.28,43.94 C204.1 | 18.89,47.11 18.89,48